# EAGLE board ftdiemu-ls (EAGLE 7.2.0)
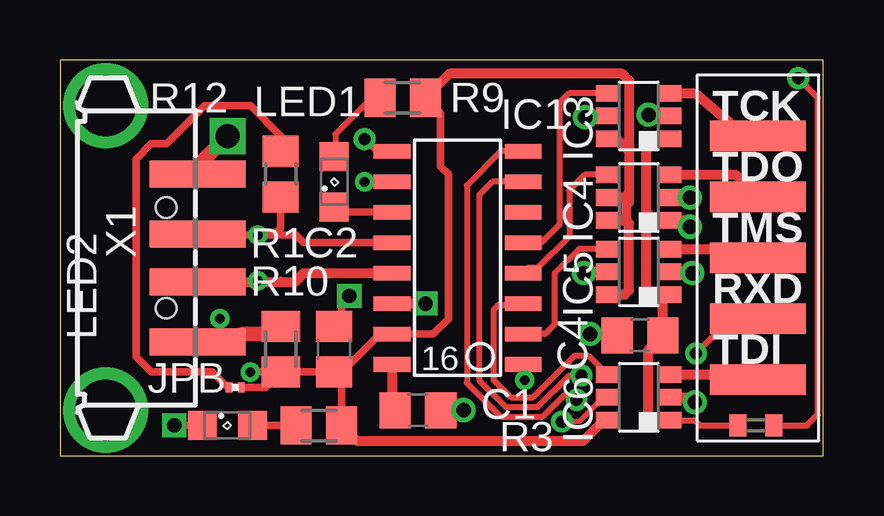
[diagram p0: board, top side]
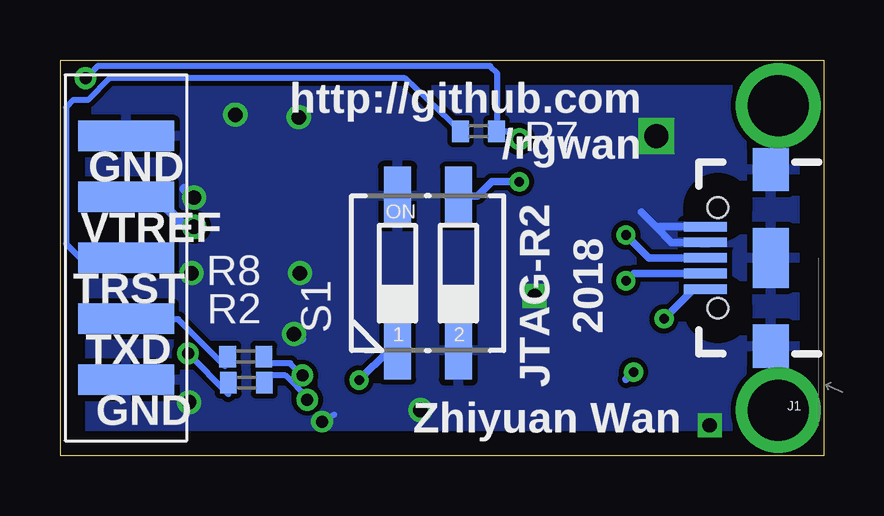
[diagram p1: board, bottom side, seen from below]

Size 31.82 x 16.5 mm. Coordinates in mm from the lower left corner, seen from the top.
Outline: 0,0 31.82,0 31.82,16.5 0,16.5 0,0
Copper layers (1*16): Top 0.035mm / dielectric 1.5mm / Bottom 0.035mm
Design rules "default": minimum track width 10mil, minimum drill 24mil, track to track 8mil, track to pad 8mil, pad to pad 8mil, via to via 8mil, smd to smd 8mil, copper to edge 40mil, drill to drill 8mil, minimum pad ring 10mil, minimum via ring 8mil, stop-mask expansion 4mil, vias tented up to drill 0mil, thermal gap 10mil
Net classes: 2 gnd: width 0.305 mm, drill 0.559 mm, clearance 0.254 mm

## Footprints (pad centres in the part's own frame; a part is rotated, then mirrored left to right if it is on the bottom)
C0805 = smd 1.3 x 1.5: 1 -0.95,0; 2 0.95,0
SIDESMT = smd 1.27 x 4: 1 -5.08,0; 2 -2.54,0; 3 0,0; 4 2.54,0; 5 5.08,0
SO-16 = smd 0.61 x 1.524: 1 -4.445,-2.794; 2 -3.175,-2.794; 3 -1.905,-2.794; 4 -0.635,-2.794; 5 0.635,-2.794; 6 1.905,-2.794; 7 3.175,-2.794; 8 4.445,-2.794; 9 4.445,2.667; 10 3.175,2.667; 11 1.905,2.667; 12 0.635,2.667; 13 -0.635,2.667; 14 -1.905,2.667; 15 -3.175,2.667; 16 -4.445,2.667
DBV_R-PDSO-G6 = smd 0.69 x 0.99: 1 -0.95,-1.29; 2 0,-1.29; 3 0.95,-1.29; 4 0.95,1.3; 5 0,1.3; 6 -0.95,1.3
USB-B-MICRO-SMD_V03 = smd 1.8 x 0.4: D+ 2.725,0; D- 2.725,0.65; GND 2.725,-1.3; ID 2.725,-0.65; VBUS 2.725,1.3 | smd 1.5 x 1.8: SHIELD1 0,3.685; SHIELD2 0,-3.685 | smd 1.5 x 2.5: SHIELD3 0,0 | hole 0.85: 2.2,2.1; 2.2,-2.1
R0201 = smd 0.28 x 0.43: 1 -0.255,0; 2 0.255,0
SML0805 = smd 1.2 x 1.2: A 1.05,0; C -1.05,0
M0805 = smd 1.3 x 1.6: 1 -0.95,0; 2 0.95,0
R0402 = smd 0.7 x 0.9: 1 -0.752,0; 2 0.752,0
R0805 = smd 1.3 x 1.5: 1 -0.95,0; 2 0.95,0
CTS-219-02J = smd 1.13 x 2.44: 1 -1.27,-3.215; 2 1.27,-3.215; 3 1.27,3.215; 4 -1.27,3.215
USB-A003 = smd 1.12 x 4: 1 -3.5,2.57; 2 -1,2.57; 3 1,2.57; 4 3.5,2.57 | drill 2.54: P$1 -6.35,-1.27; P$2 6.35,-1.27

## Placement (x,y rotation side)
C1  100n  [C0805]  14.92,1.91 0 top
C2  10u  [C0805]  11.43,4.45 90 top
C4  100n  [C0805]  24.18,5.03 180 top
CON1  SIDESMT  [SIDESMT]  29.1,8.26 90 top
CON2  SIDESMT  [SIDESMT]  29.1,8.26 90 bottom
IC1  CH551G-16L  [SO-16]  16.51,8.26 90 top
IC3  741T45W6  [DBV_R-PDSO-G6]  24.13,14.17 90 top
IC4  741T45W6  [DBV_R-PDSO-G6]  24.13,10.77 90 top
IC5  741T45W6  [DBV_R-PDSO-G6]  24.13,7.67 90 top
IC6  741T45W6  [DBV_R-PDSO-G6]  24.13,2.44 90 top
J1  USB-MICROB"  [USB-B-MICRO-SMD_V03]  2.22,8.26 180 bottom
JPB  JP  [R0201]  7.3,2.86 0 top
LED1  [SML0805]  11.43,11.43 90 top
LED2  [SML0805]  6.99,1.27 0 top
R1  100mA FUSE  [M0805]  9.21,4.45 270 top
R2  22  [R0402]  24.08,3.05 0 bottom
R3  22/680  [R0402]  29.01,1.27 0 top
R7  22/680  [R0402]  14.4,13.54 0 bottom
R8  22  [R0402]  24.1,4.14 0 bottom
R9  2.2k  [M0805]  14.29,14.92 0 top
R10  2.2k  [M0805]  10.79,1.27 0 top
R12  20k  [R0805]  9.21,11.75 90 top
S1  219-02J  [CTS-219-02J]  16.51,7.62 0 bottom
X1  [USB-A003]  3.17,8.26 270 top

## Library data of the parts
C1 C2 C4 JPB R1-R3 R7-R10 R12 = rcl
CON1 CON2 = con-amp
IC1 = texas
IC3-IC6 = 74xx-little-us
J1 = SparkFun-Connectors; PROD_ID: CONN-11752
LED1 LED2 = led
S1 = switch-dil; OC_FARNELL: unknown; OC_NEWARK: unknown
X1 = con-yamaichi; OC_FARNELL: unknown; OC_NEWARK: unknown

## Nets
+3V3: C1.1 IC1.16
+5V: C2.1 IC1.15 IC3.6 IC4.5 IC4.6 IC5.6 IC6.6 JPB.2 R1.2 R9.2 R10.2
DM: IC1.13 J1.D- X1.3
DP: IC1.12 J1.D+ R12.1 X1.2
FUNC_SEL0: IC1.10 S1.3
FUNC_SEL1: IC1.1 S1.1
GND: C1.2 C2.2 C4.2 CON2.1 CON2.5 IC1.14 IC3.2 IC3.5 IC4.2 IC5.2 IC5.5 IC6.2 IC6.5 J1.GND J1.ID J1.SHIELD1 J1.SHIELD2 J1.SHIELD3 LED2.C S1.2 S1.4 X1.1
JTAG_RST: IC1.9 R3.2 R7.2
JTAG_TCK: IC1.5 IC3.4
JTAG_TDI: IC1.3 IC6.4
JTAG_TDO: IC1.4 IC4.4
JTAG_TMS: IC1.2 IC5.4
LED: IC1.11 LED1.C
N$1: CON1.5 IC3.3
N$2: CON1.4 IC4.3
N$3: CON1.3 IC5.3
N$4: CON1.2 R2.1
N$5: CON1.1 IC6.3
N$6: CON2.3 R7.1
N$7: CON2.2 R8.1
N$11: LED1.A R9.1
N$12: LED2.A R10.1
N$13: JPB.1 R12.2
RESERVE1: IC1.8 R2.2
RESERVE2: IC1.7 R8.2
VBUS: J1.VBUS R1.1 X1.4
VCCINT: C4.1 CON2.4 IC3.1 IC4.1 IC5.1 IC6.1 R3.1

## Tracks (layer width: path | path; a pad name or v marks a point on that pad's centre or on a via)
+3V3
  Top 0.406: IC1.16 13.84,1.72 C1.1
+5V  (via drill 0.4)
  Top 0.305: C2.1 11.75,3.5 13.34,5.08 IC1.15 15.56,5.08 16.19,5.71 16.19,11.75 15.87,12.07 15.87,14.29 R9.2 | R1.2 C2.1 | C2.1 11.75,3.17 R10.2 | JPB.2 8.57,2.86 R1.2 | v7.94,3.49 R1.2
  Top 0.406: R10.2 12.4,0.61 21.79,0.61 22.67,1.49 IC6.6 | 23.72,10.97 23.52,10.77 | 23.52,10.77 IC4.5 | 23.59,9.82 IC4.6 23.45,9.82 | 23.59,9.82 23.62,9.86 23.62,10.46 | 23.62,10.46 23.62,10.67 23.52,10.77 | IC5.6 23.54,6.72 23.72,6.91 23.72,9.68 23.59,9.82 | R9.2 16.27,15.95 23.42,15.95 23.72,15.65 23.72,12.7 | 23.72,12.7 23.72,10.57 23.62,10.46 | IC3.6 23.2,13.22 23.72,12.7
  Bottom 0.305: 8.25,3.18 v7.94,3.49
DM  (via drill 0.4)
  Top 0.305: v8.26,7.3 9.21,7.25
  Top 0.406: X1.3 9.21,7.25 9.79,7.25 10.16,7.62 IC1.13
  Bottom 0.305: J1.D- 7.92,7.61 v8.26,7.3
DP  (via drill 0.4)
  Top 0.305: IC1.12 10.16,8.89 9.84,9.21 8.89,9.21 | 8.89,9.21 v8.26,9.21 5.79,9.21 X1.2 | R12.1 9.19,9.51 8.89,9.21
  Bottom 0.305: J1.D+ 7.3,8.26 v8.26,9.21
FUNC_SEL0  (via drill 0.4)
  Top 0.305: v12.7,11.43 IC1.10
  Bottom 0.305: S1.3 14.44,10.84 IC1.10 v12.7,11.43
FUNC_SEL1  (via drill 0.4)
  Top 0.305: IC1.1 19.37,3.75 19.37,3.17 v19.38,3.16
  Bottom 0.305: S1.1 18.14,4.41 v19.38,3.16
GND  (via drill 0.5, 0.6, 1)
  Top 0.203: v20.93,1.42 21.64,1.42 22.66,2.44
  Top 0.254: IC6.5 22.66,2.44
  Top 0.305: LED2.C v4.76,1.27 | 11.74,5.39 11.74,6.35 v12.06,6.67
  Top 0.406: IC1.14 v15.24,6.35 | C2.2 11.74,5.39 | C1.2 16.84,1.89 v16.83,1.91 | IC4.2 v26.26,10.77 | IC5.2 26.31,7.67 v26.36,7.62 | IC6.2 26.26,2.44 v26.47,2.23 | C4.2 22.15,5.03 v22.1,5.08 | IC3.5 21.95,14.17 v21.89,14.12 | IC3.2 24.59,14.17 v24.54,14.22 | IC5.5 22,7.67 v21.84,7.62
  Top 0.61: X1.1 5.75,12.1 v6.99,13.34
  Bottom 0.254: v20.93,1.42 20.42,1.73
  Bottom 0.305: v4.76,1.27 5.08,1.27 | J1.GND 7.01,9.55 | 7.01,9.55 7.62,10.16 | J1.ID 6.37,8.9 7.01,9.55
  Bottom 0.406: v26.26,10.77 26.31,10.77 26.67,11.12 | v26.47,2.23 26.67,2.23 26.77,2.13 | v22.1,5.08 22,5.08 21.79,4.88 | v21.89,14.12 21.59,14.12 | v24.54,14.22 24.43,14.22 24.33,14.33 | 21.95,7.72 v21.84,7.62
  pour Bottom: 31.64,16.51 31.64,0 0,0 0,16.51
JTAG_RST  (via drill 0.5)
  Top 0.254: v12.7,13.21 13.21,12.7 IC1.9 | R3.2 31.14,1.27 31.6,1.73 31.6,14.94 v30.79,15.75
  Bottom 0.254: v12.7,13.21 13.23,13.54 R7.2 13.61,13.57 13.61,15.95 13.92,16.26 30.28,16.26 v30.79,15.75
JTAG_TCK
  Top 0.254: IC3.4 21.22,15.12 20.83,14.73 20.83,9.65 20.02,8.84 19.36,8.84 IC1.5
JTAG_TDI
  Top 0.254: IC6.4 22.05,4.17 21.44,4.17 19.71,2.44 18.8,2.44 18.09,3.15 18.09,6.1 18.29,6.3 19.25,6.3 IC1.3
JTAG_TDO
  Top 0.254: IC4.4 21.88,11.72 21.23,11.07 21.23,9.14 19.91,7.82 19.51,7.82 IC1.4
JTAG_TMS
  Top 0.254: IC5.4 21.63,8.62 20.62,7.62 20.62,5.49 20.22,5.08 IC1.2
LED
  Top 0.305: IC1.11 11.53,10.16 LED1.C
N$1
  Top 0.406: IC3.3 26.48,15.12 28.5,13.41 29.02,13.41 CON1.5
N$2
  Top 0.406: IC4.3 28.17,11.72 CON1.4
N$3
  Top 0.406: IC5.3 28.73,8.62 CON1.3
N$4  (via drill 0.5)
  Top 0.254: v26.52,4.27 27.84,5.59 28.97,5.59 CON1.2
  Bottom 0.254: R2.1 24.83,2.58 v26.52,4.27
N$5
  Top 0.406: 27.89,3.35 28.92,3.35 CON1.1 28.88,3.39 IC6.3
N$6
  Bottom 0.254: CON2.3 31.01,8.26 31.39,8.64 31.6,8.84 31.6,14.53 31.29,14.83 30.68,14.83 29.77,15.75 17.46,15.75 R7.1
N$7
  Bottom 0.254: R8.1 24.97,3.73 26.92,5.69 29.07,5.69 CON2.2
N$11
  Top 0.254: R9.1 12.99,14.92 11.48,13.41 11.48,12.53 LED1.A
N$12
  Top 0.305: LED2.A R10.1
N$13
  Top 0.305: JPB.1 6.99,2.87 6.67,3.17 6.35,3.49 3.81,3.49 3.17,4.13 3.17,12.38 3.81,13.02 4.45,13.02 6.03,14.61 7.94,14.61 9.21,13.34 R12.2
RESERVE1  (via drill 0.5)
  Top 0.254: IC1.8 18.39,12.7 16.97,11.28 16.97,3.05 18.39,1.63 20.12,1.63 21.03,2.54 21.34,2.54 v21.54,2.34
  Bottom 0.254: v21.54,2.34 21.54,2.44 22.45,3.35 23.02,3.35 R2.2
RESERVE2  (via drill 0.5)
  Top 0.254: IC1.7 18.03,11.43 17.48,10.87 17.48,3.15 18.59,2.03 19.91,2.03 21.23,3.35 v21.74,3.35 21.64,3.25
  Bottom 0.254: v21.74,3.35 22.25,3.86 23.07,3.86 R8.2
VBUS  (via drill 0.4)
  Top 0.305: 8.89,5.08 9.21,5.08 | v6.67,5.71 6.67,5.07 6.35,4.75
  Top 0.61: X1.4 6.35,4.75 7.29,4.75 7.62,5.08 9.21,5.08 R1.1
  Bottom 0.305: J1.VBUS 5.43,6.96 v6.67,5.71 6.52,5.57
VCCINT  (via drill 0.6)
  Top 0.254: IC6.1 26.45,1.49 26.67,1.27 R3.1
  Top 0.406: 24.81,9.82 IC4.1 25.99,9.82 v26.26,9.55 | 24.81,9.82 24.43,9.45 24.43,7.01 24.74,6.71 25.41,6.71 IC5.1 25.13,6.43 C4.1 24.54,4.43 24.54,1.73 24.77,1.49 IC6.1 | IC3.1 24.65,13.22 24.43,13.01 24.43,10.19 24.81,9.82
  Bottom 0.406: CON2.4 29.02,10.87 27.94,10.87 | 27.94,10.87 27.79,10.87 | v26.26,9.55 26.62,9.55 27.94,10.87

## Text on the board
bPlace: http://github.com / /rgwan | 2018 | JTAG-R2 | Zhiyuan Wan
tNames: TCK | TDO | TMS | RXD | TDI
bNames: GND | VTREF | TRST | TXD | GND